# Altium PCB LM_001_Rev_F.PcbDoc (part 2 of 2)
Units mm, origin at the board's own origin, x right, y up, seen from the top; angles counter-clockwise.
Board outline 67 x 121.83 mm, 4 copper layers (Top Layer, +5V, Signal Layer 1, Bottom Layer), stack 0.778 mm thick; 108 components, 99 nets, 342 pads, 23 vias.
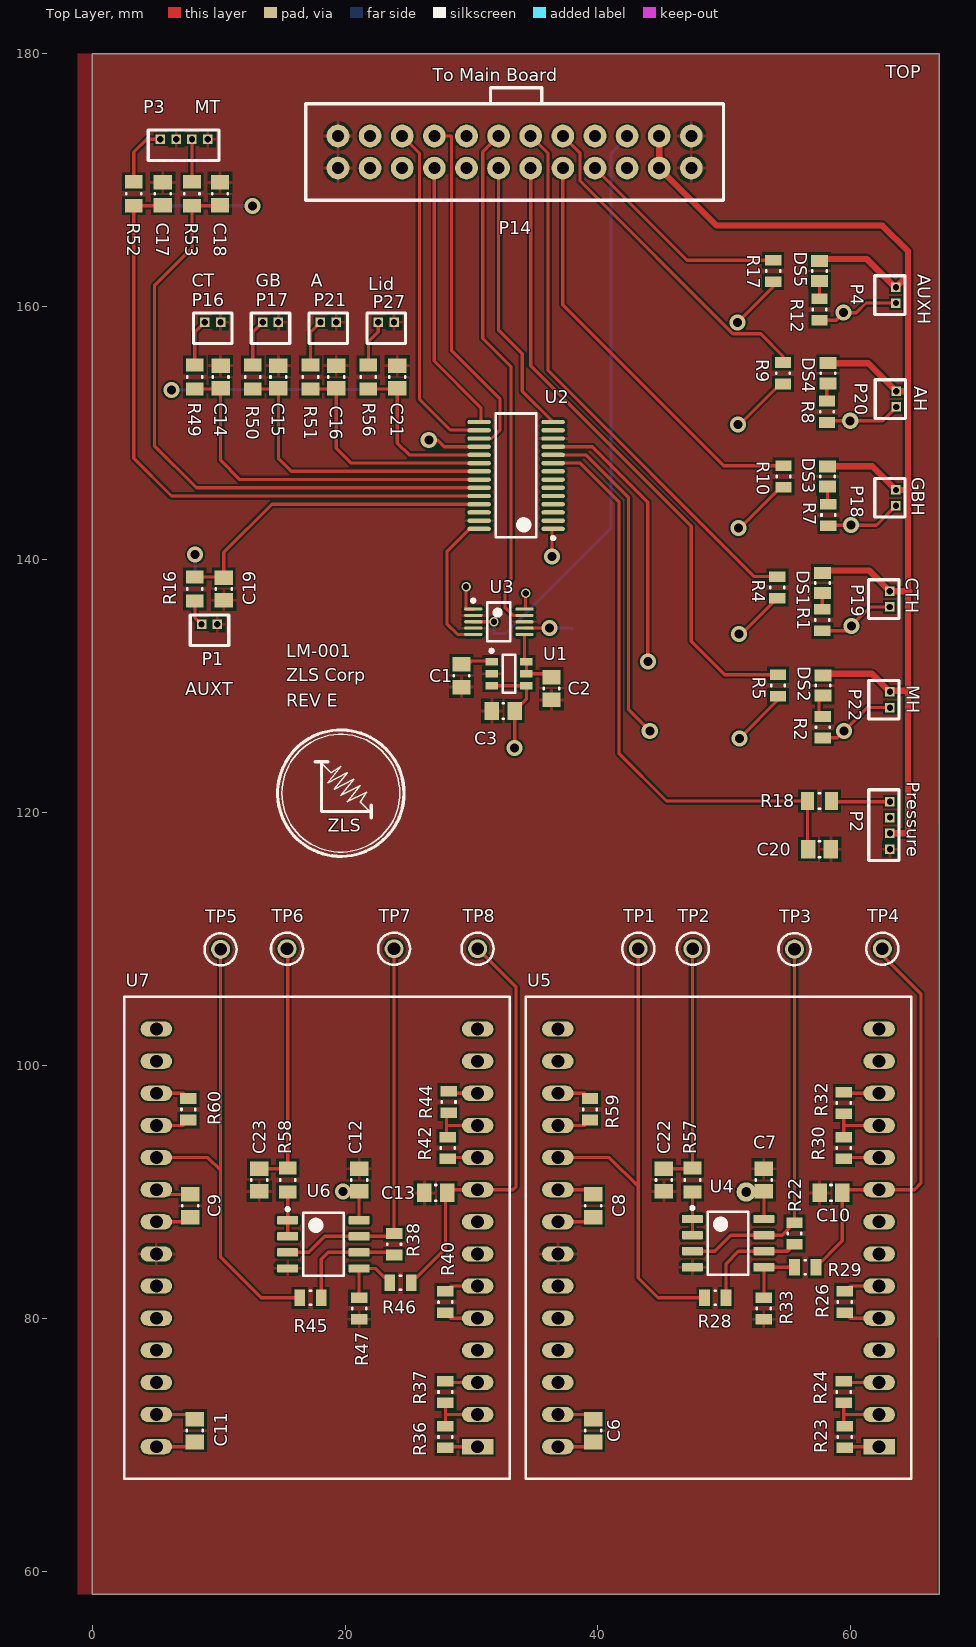
[diagram p0: Top Layer view]

## Polygon pours and split planes (outlines as drawn) (continued)
+5 on +5V (split plane): 66.49,179.49 66.49,58.676 0.51,58.676 0.51,179.49

## Silkscreen, mask and mechanical layers (free items; w line width, h text height)
Top Overlay:
  circle w0.1: c19.664,121.519 r4.663
  circle w0.254: c19.664,121.519 r5
  lines w0.127: 18.14,123.882 18.902,123.12 19.664,123.628 18.648,122.358 20.172,123.12 19.156,121.85 20.68,122.612 19.664,121.342 21.188,122.104 20.172,120.834 21.696,121.596 21.188,120.834 21.95,120.072
  lines w0.254: 17.632,124.009 18.648,124.009 ; 18.14,123.882 18.14,120.072 21.95,120.072 ; 22.077,119.564 22.077,120.58 ; 31.496,176.095 31.496,177.292 35.476,177.292 ; 35.56,176.095 35.56,177.292
  text "TOP" at 62.738,178.054 h1
  text "To Main Board" at 26.924,177.8 h1
  text "MT" at 8.128,175.26 h1
  text "AUXH" at 65.278,162.56 h1 r270
  text "CT" at 7.874,161.544 h1
  text "GB" at 12.954,161.544 h1
  text "A" at 17.292,161.544 h1
  text "Lid" at 21.844,161.29 h1
  text "AH" at 65.024,153.706 h1 r270
  text "GBH" at 64.827,146.511 h1 r270
  text "CTH" at 64.348,138.554 h1 r270
  text "LM-001" at 15.342,132.272 h1
  text "ZLS Corp" at 15.342,130.378 h1
  text "MH" at 64.4,130.037 h1 r270
  text "AUXT" at 7.366,129.258 h1
  text "REV E" at 15.342,128.346 h1
  text "Pressure" at 64.4,122.417 h1 r270
  text "ZLS" at 18.648,118.471 h1

## Dimensions
66.802,180.086 to 67,58.166 on Mechanical 13
0,180 to 67,180 on Mechanical 13